# EAGLE board Codeshelf-0008.v01.brd.org (EAGLE 6.5.0)
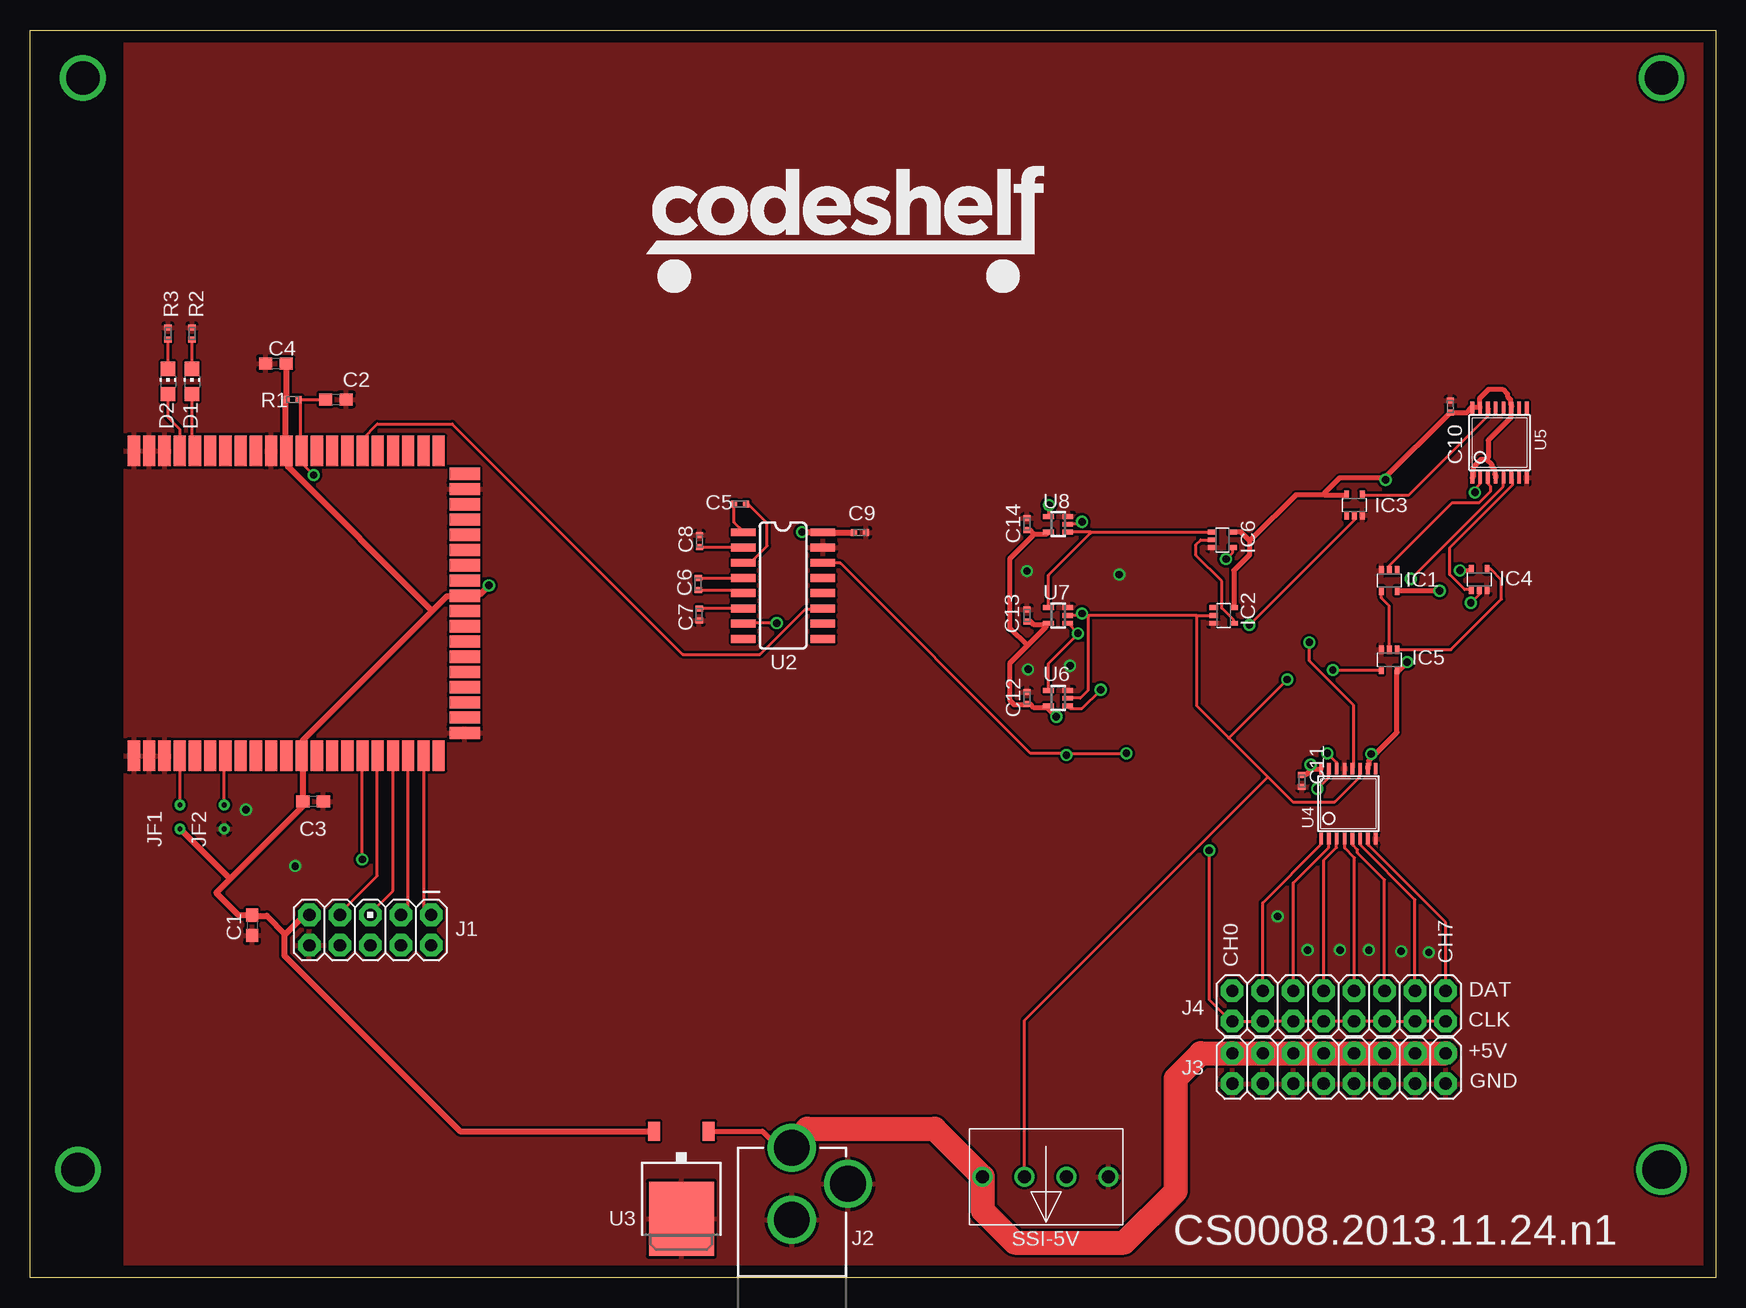
[diagram p0: board, top side]
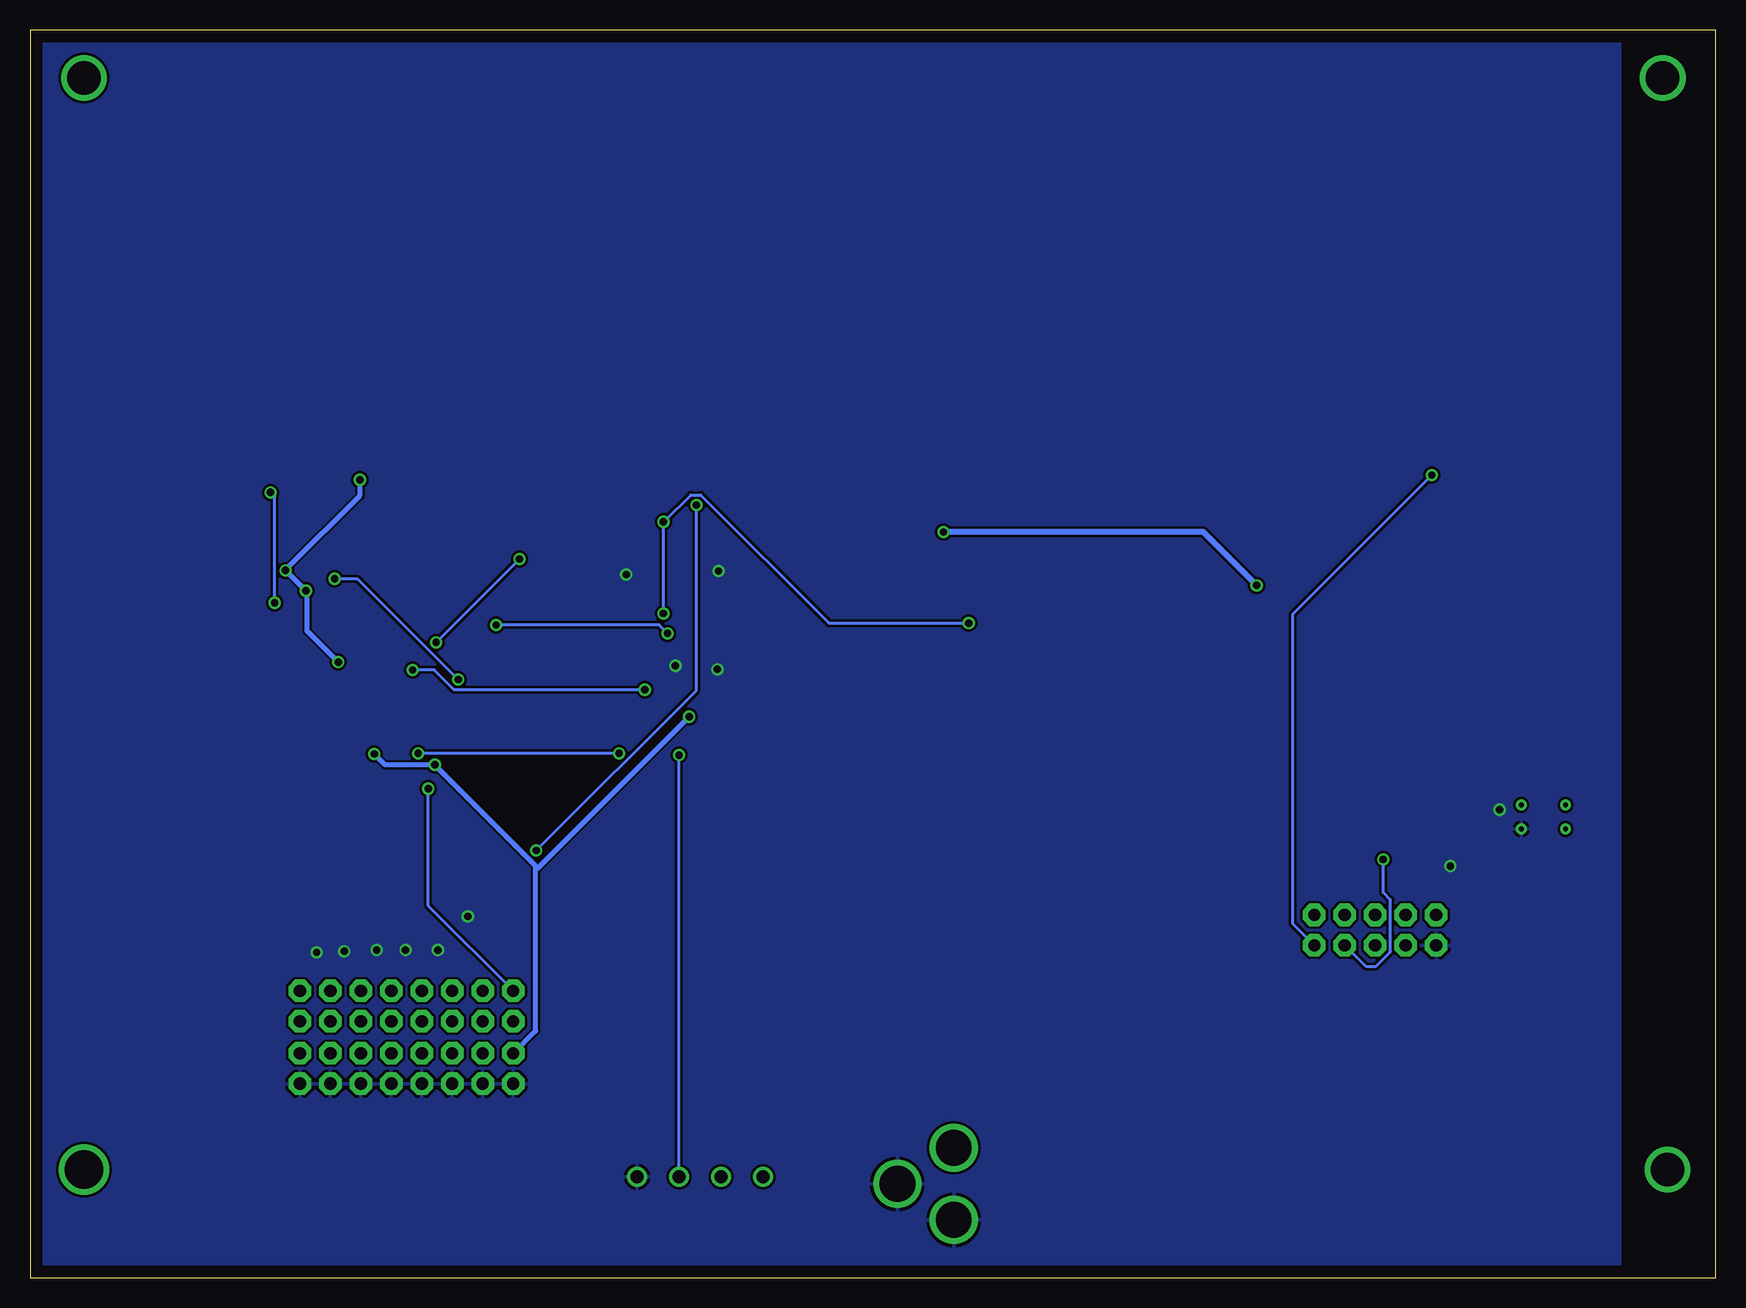
[diagram p1: board, bottom side, seen from below]

Size 140.5 x 104 mm. Coordinates in mm from the lower left corner, seen from the top.
Outline: 0,0 0,104 140.5,104 140.5,0 0,0
Copper layers (1*16): Top 0.035mm / dielectric 1.5mm / Bottom 0.035mm
Design rules "default *": minimum track width 10mil, minimum drill 24mil, track to track 8mil, track to pad 8mil, pad to pad 8mil, via to via 8mil, smd to smd 8mil, copper to edge 40mil, drill to drill 8mil, minimum pad ring 10mil, minimum via ring 8mil, stop-mask expansion 4mil, vias tented up to drill 0mil, thermal gap 10mil
Net classes: 1 3v3: width 0.5 mm; 2 5V: width 0.4 mm; 4 GND: width 0.5 mm; 5 RS485: width 0.4 mm

## Footprints (pad centres in the part's own frame; a part is rotated, then mirrored left to right if it is on the bottom)
C0603 = smd 1.1 x 1: 1 -0.85,0; 2 0.85,0
C0402 = smd 0.5 x 0.6: 1 -0.5,0; 2 0.5,0
CHIP-LED0805 = smd 1.2 x 1.2: A 0,-1.05; C 0,1.05
SC70-5 = smd 0.4 x 0.7: 1 -0.65,-0.85; 2 0,-0.85; 3 0.65,-0.85; 4 0.65,0.85; 5 -0.65,0.85
AVR_ICSP = drill 1.016 pad 1.88 octagon: 1 -1.27,5.08; 2 1.27,5.08; 3 -1.27,2.54; 4 1.27,2.54; 5 -1.27,0; 6 1.27,0; 7 -1.27,-2.54; 8 1.27,-2.54; 9 -1.27,-5.08; 10 1.27,-5.08
POWER_JACK_PTH = drill 2.997: GND 0,7.7; GNDBREAK 4.7,10.7; PWR 0,13.7
2X8 = drill 1.016 pad 1.88 octagon: 1 0,0; 2 0,2.54; 3 2.54,0; 4 2.54,2.54; 5 5.08,0; 6 5.08,2.54; 7 7.62,0; 8 7.62,2.54; 9 10.16,0; 10 10.16,2.54; 11 12.7,0; 12 12.7,2.54; 13 15.24,0; 14 15.24,2.54; 15 17.78,0; 16 17.78,2.54
JUMPER-VIA-2X = drill 0.4: 1 -1,0; 2 1,0
RF-R0402 = smd 0.5 x 0.6: 1 -0.5,0; 2 0.5,0
MOLEX-39357-0004 = drill 1.1: 1 -5.2,0; 2 -1.7,0; 3 1.8,0; 4 5.3,0
ZSFM201-1 = smd 2.54 x 1.016: 1 -12.7,28.829; 2 -12.7,27.559; 3 -12.7,26.289; 4 -12.7,25.019; 5 -12.7,23.749; 6 -12.7,22.479; 7 -12.7,21.209; 8 -12.7,19.939; 9 -12.7,18.669; 10 -12.7,17.399; 11 -12.7,16.129; 12 -12.7,14.859; 13 -12.7,13.589; 14 -12.7,12.319; 15 -12.7,11.049; 16 -12.7,9.779; 17 -12.7,8.509; 18 -12.7,7.239; 19 -12.7,5.969; 20 -12.7,4.699; 21 -12.7,3.429; 40 12.7,3.429; 41 12.7,4.699; 42 12.7,5.969; 43 12.7,7.239; 44 12.7,8.509; 45 12.7,9.779; 46 12.7,11.049; 47 12.7,12.319; 48 12.7,13.589; 49 12.7,14.859; 50 12.7,16.129; 51 12.7,17.399; 52 12.7,18.669; 53 12.7,19.939; 54 12.7,21.209; 55 12.7,22.479; 56 12.7,23.749; 57 12.7,25.019; 58 12.7,26.289; 59 12.7,27.559; 60 12.7,28.829 | smd 1.016 x 2.54: 22 -10.795,1.27; 23 -9.525,1.27; 24 -8.255,1.27; 25 -6.985,1.27; 26 -5.715,1.27; 27 -4.445,1.27; 28 -3.175,1.27; 29 -1.905,1.27; 30 -0.635,1.27; 31 0.635,1.27; 32 1.905,1.27; 33 3.175,1.27; 34 4.445,1.27; 35 5.715,1.27; 36 6.985,1.27; 37 8.255,1.27; 38 9.525,1.27; 39 10.795,1.27
SO016 = smd 0.66 x 2.032: 1 -4.445,-3.315; 2 -3.175,-3.315; 3 -1.905,-3.315; 4 -0.635,-3.315; 5 0.635,-3.315; 6 1.905,-3.315; 7 3.175,-3.315; 8 4.445,-3.315; 9 4.445,3.315; 10 3.175,3.315; 11 1.905,3.315; 12 0.635,3.315; 13 -0.635,3.315; 14 -1.905,3.315; 15 -3.175,3.315; 16 -4.445,3.315
TO252 = smd 1 x 1.6: 1 -2.28,-4.8; 2 2.28,-4.8 | smd 5.4 x 6.2: 3 0,2.5
TSSOP16 = smd 0.305 x 0.991: 1 -2.275,-2.918; 2 -1.625,-2.918; 3 -0.975,-2.918; 4 -0.325,-2.918; 5 0.325,-2.918; 6 0.975,-2.918; 7 1.625,-2.918; 8 2.275,-2.918; 9 2.275,2.918; 10 1.625,2.918; 11 0.975,2.918; 12 0.325,2.918; 13 -0.325,2.918; 14 -0.975,2.918; 15 -1.625,2.918; 16 -2.275,2.918
SOT353 = smd 0.4 x 0.9: 1 -0.65,-0.8; 2 0,-0.8; 3 0.65,-0.8; 4 0.65,0.8; 5 -0.65,0.8

## Placement (x,y rotation side)
C1  100pF  [C0603]  18.51,29.36 270 top
C2  1nF  [C0603]  25.5,73.2 0 top
C3  100pF  [C0603]  23.6,39.7 180 top
C4  100pF  [C0603]  20.5,76.2 0 top
C5  .1uF  [C0402]  59.2,64.47 0 top
C6  .1uF  [C0402]  55.7,57.8 270 top
C7  .1uF  [C0402]  55.79,55.27 270 top
C8  .1uF  [C0402]  55.8,61.4 90 top
C9  .1uF  [C0402]  69.2,62.1 0 top
C10  .1uF  [C0402]  118.4,72.6 90 top
C11  .1uF  [C0402]  106,41.4 90 top
C12  .1uF  [C0402]  83.1,48.3 270 top
C13  .1uF  [C0402]  83.1,55.2 270 top
C14  .1uF  [C0402]  83.1,62.8 270 top
D1  RED  [CHIP-LED0805]  13.5,74.7 0 top
D2  GREEN  [CHIP-LED0805]  11.5,74.7 0 top
IC1  74AHC1G04DCK  [SC70-5]  113.3,58.1 180 top
IC2  74AHC1G04DCK  [SC70-5]  99.5,55.2 270 top
IC3  74AHC1G04DCK  [SC70-5]  110.4,64.4 0 top
IC4  74AHC1G08DCK  [SC70-5]  120.8,58.2 0 top
IC5  74AHC1G08DCK  [SC70-5]  113.3,51.5 180 top
IC6  74AHC1G08DCK  [SC70-5]  99.4,61.5 270 top
J1  M05X2PTH  [AVR_ICSP]  28.37,28.96 270 top
J2  POWER_JACKPTH  [POWER_JACK_PTH]  63.5,-2.9 0 top
J3  M08X2  [2X8]  118,18.7 180 top
J4  M08X2  [2X8]  118,23.9 180 top
JF1  JUMPER-2X-SMT-VIA  [JUMPER-VIA-2X]  12.5,38.4 90 top
JF2  JUMPER-2X-SMT-VIA  [JUMPER-VIA-2X]  16.2,38.4 90 top
R1  100K  [RF-R0402]  21.9,73.2 180 top
R2  220  [RF-R0402]  13.5,78.7 270 top
R3  390  [RF-R0402]  11.5,78.7 270 top
SSI-5V  HEADER-4X39357  [MOLEX-39357-0004]  84.7,8.4 180 top
U1  ZSFM201-1A  [ZSFM201-1]  37.5,56.2 90 top
U2  MAX232SOIC16  [SO016]  62.78,57.68 270 top
U3  LM2936DT-3.3  [TO252]  54.3,7.4 180 top
U4  SN74HC595PW  [TSSOP16]  109.9,39.5 0 top
U5  74HCT193PW  [TSSOP16]  122.5,69.6 0 top
U6  D-FLIP-FLOP-74LV1G79  [SOT353]  85.7,48.3 90 top
U7  D-FLIP-FLOP-74LV1G79  [SOT353]  85.7,55.2 90 top
U8  D-FLIP-FLOP-74LV1G79  [SOT353]  85.7,62.8 90 top
U$1  [CODESHELF-LOGO]  51.4,82.1 0 top

## Library data of the parts
C1 C3 C4 = GW-devices; MFGN: Murata; MFGP: C0603C101K5RACTU
C2 = GW-devices; MFGN: Murata; MFGP: C0603C102K4RACTU
C5-C14 = GW-devices; MFGN: Murata; MFGP: GRM155R61C104KA88D; PRICE: 0.03
D1 = led; MFGN: OSRAM; MFGP: Q62702P5182; NOTES: DNP
D2 = led; MFGN: OSRAM; MFGP: Q65110P5179; NOTES: DNP
IC1-IC3 = 74xx-little-us; MFGN: NXP; MFGP: 74LVC1GU04GW; PRICE: 0.25
IC4-IC6 = 74xx-little-us; MFGN: Diodes, Inc; MFGP: 74LVC1G08SE; PRICE: 0.38
J1 J3 J4 = SparkFun
J2 = GW-devices; MFG: Kobiconn; MFGP: 163-7620-E
JF1 JF2 U$1 = GW-devices
R1 = GW-devices; MFGN: Panasonic; MFGP: ERJ-2GEJ104X
R2 = GW-devices; MFGN: Panasonic; MFGP: ERJ-2GEJ224X; NOTES: DNP
R3 = GW-devices; MFGN: Panasonic; MFGP: ERJ-2GEJ394X; NOTES: DNP
SSI-5V = GW-devices; MFGN: Molex; MFGP: 39357-0004; PRICE: 1.00
U1 = GW-devices; MFGN: CEL; MFGP: ZFSM-201-1C; PRICE: 29.00
U2 = SparkFun; MFGN: TI; MFGP: MAX232DR; PRICE: 0.86
U3 = national-semiconductor; MFGN: STM Electronics; MFGP: L4931ABDT33-TR; MPN: LM2936DT-3.3.; OC_FARNELL: 1286863; OC_NEWARK: 26M0361; PRICE: 1.00
U4 = GW-devices; MFGN: TI; MFGP: SN74HC595PWR; PRICE: 0.31
U5 = GW-devices; MFGN: NXP; MFGP: 74HCT193PW; PRICE: 0.60
U6-U8 = GW-devices; MFGN: TI; MFGP: SN74LVC1G79DBVR; PRICE: 0.27

## Nets
+3V3 [3v3]: C1.1 C3.2 C4.2 C9.1 J1.9 JF1.1 R1.2 U1.12 U1.31 U1.50 U2.16 U3.2
+5V [5V]: C10.1 C11.2 C12.2 C13.2 C14.2 IC1.5 IC2.5 IC3.5 IC4.5 IC5.5 IC6.5 J2.PWR J3.1 J3.3 J3.5 J3.7 J3.9 J3.11 J3.13 J3.15 SSI-5V.4 U3.1 U4.10 U4.16 U5.1 U5.4 U5.11 U5.15 U5.16 U6.5 U7.5 U8.5
C1: C5.1 U2.1
C2: C6.1 U2.4
GND [GND]: C1.2 C2.2 C3.1 C4.1 C7.2 C8.2 C9.2 C10.2 C11.1 C12.1 C13.1 C14.1 IC1.3 IC2.3 IC3.3 IC4.3 IC5.3 IC6.3 J1.10 J2.GND J2.GNDBREAK J3.2 J3.4 J3.6 J3.8 J3.10 J3.12 J3.14 J3.16 JF2.1 R2.1 R3.1 SSI-5V.1 U1.1 U1.2 U1.3 U1.22 U1.38 U1.51 U1.58 U1.59 U1.60 U2.15 U3.3 U4.8 U4.13 U5.8 U6.3 U7.3 U8.3
N$1: D2.A U1.57
N$2: D1.A U1.56
N$3: D2.C R3.2
N$4: D1.C R2.2
N$6: JF2.2 U1.7
N$7: JF1.2 U1.4
N$8: C5.2 U2.3
N$10: J4.13 U4.1
N$11: C6.2 U2.5
N$12: C7.1 U2.6
N$13: J4.11 U4.2
N$14: J4.9 U4.3
N$15: C8.1 U2.2
N$16: J4.7 U4.4
N$17: J4.5 U4.5
N$18: J4.3 U4.6
N$19: J4.1 U4.7
N$20: J4.15 U4.15
N$22: IC1.4 IC5.2
N$23: IC4.4 IC5.1
N$24: IC5.4 U6.1
N$25: IC3.2 U6.4 U7.1
N$26: IC6.1 U7.4 U8.1
N$28: IC2.4 IC6.2
N$29: IC1.2 U5.3
N$30: IC4.2 U5.2
N$31: IC4.1 U5.6
N$32: IC3.4 U5.14
N$33: IC6.4 U4.12
RESET: C2.1 J1.2 R1.1 U1.49
RTCK: J1.4 U1.16
SSI-CLK: J4.2 J4.4 J4.6 J4.8 J4.10 J4.12 J4.14 J4.16 U8.4
SSI-CLK-3V3: U1.42
SSI-CLK-5V: IC2.2 SSI-5V.3 U2.7 U4.11 U5.5 U6.2 U7.2 U8.2
SSI-TX-3V3: U1.45 U2.11
SSI-TX-5V: SSI-5V.2 U2.14 U4.14
TCK: J1.3 U1.19
TDI: J1.5 U1.18
TDO: J1.7 U1.17
TMS: J1.1 U1.20

## Tracks (layer width: path | path; a pad name or v marks a point on that pad's centre or on a via)
+3V3  (via drill 0.61)
  Top 0.5: 21.27,28.62 22.85,30.2 23.25,30.2 J1.9 | 21.27,28.62 21.2,28.55 21.2,26.85 35.85,12.2 U3.2 | 21.27,28.62 19.75,30.15 18.75,30.15 C1.1 18.5,30.25 17.35,30.25 15.53,32.08 16.68,33.23 | C4.2 21.4,76.15 R1.2 21.3,73 21.3,68.95 21.35,68.9 U1.50 21.5,68.7 21.5,67.6 33.52,55.58 | 33.52,55.58 22.75,44.8 22.75,43.7 U1.12 22.75,43.4 C3.2 22.85,39.5 22.85,39.4 16.68,33.23 | 33.52,55.58 34.75,56.8 36.2,56.8 U1.31 36.45,56.95 37.5,56.95 v38.25,57.7 | v64.35,62.15 65.85,62.15 U2.16 66.3,62.1 C9.1 | 16.68,33.23 JF1.1
  Bottom 0.5: v64.35,62.15 42.7,62.15 v38.25,57.7
+5V  (via drill 0.61)
  Top 0.4: 121.45,68.2 120.95,68.2 120.3,67.55 120.3,66.75 120.25,66.7 U5.1 | 121.45,68.2 121.85,67.8 121.85,67.6 122.1,67.35 122.1,66.95 122.2,66.85 122.2,66.7 U5.4 | 121.45,68.2 121.55,68.35 121.55,69.8 123.45,71.7 123.45,72.5 U5.11 123.5,72.7 123.4,72.8 123.4,73.2 123.15,73.45 123.15,73.65 122.75,74.05 121.6,74.05 120.85,73.3 120.85,72.75 U5.15 120.85,72.55 120.4,72.55 U5.16 120.2,72.55 119.75,72.1 C10.1 118.25,72 112.9,66.65 | IC2.5 100.35,58.95 101.65,60.25 101.65,61.45 | 101.65,61.45 100.95,62.15 IC6.5 | 107.9,65.25 105.5,65.25 101.8,61.55 101.65,61.45 | 107.9,65.25 IC3.5 | 112.9,66.65 109.15,66.65 107.9,65.4 107.9,65.25 | C14.2 83.4,62.3 83.7,62 | 83.7,62 84.75,62 U8.5 | 84.75,47.5 83.7,47.5 83.4,47.8 C12.2 82.95,47.75 82.05,47.75 81.7,48.1 81.7,51.25 83.12,52.67 | 84.75,47.5 U6.5 | C13.2 83.4,54.7 83.7,54.4 84.7,54.4 | 84.7,54.4 84.75,54.4 U7.5 | 83.12,52.67 84.7,54.25 84.7,54.4 | 83.7,62 83.6,61.85 81.7,59.95 81.7,54.1 83.12,52.67 | U3.1 61.05,12.2 62.5,10.75 J2.PWR | v117.5,57.25 IC1.5 | v119.2,58.95 120.05,58.95 IC4.5 | C11.2 106.35,41.9 106.85,42.4 | 106.85,42.4 107.6,42.4 U4.16 | 111.97,43.48 111.6,43.1 111.6,42.7 111.5,42.6 111.5,42.45 U4.10 | 111.97,43.48 113.95,45.45 IC5.5 114.1,50.6 v114.8,51.3 | v106.75,42.75 106.75,42.55 106.85,42.4 | v111.8,43.65 111.97,43.48 | v85.55,46.75 84.9,47.4 84.75,47.5 | v113,66.5 112.9,66.65
  Top 2: J2.PWR 64.8,12.4 75.4,12.4 SSI-5V.4 79.4,5.6 82.1,2.9 91.2,2.9 95.5,7.2 95.5,16.6 97.6,18.7 J3.15 J3.13 J3.11 J3.9 J3.7 J3.5 J3.3 J3.1
  Bottom 0.4: v111.8,43.65 110.9,42.75 v106.75,42.75 106.65,42.6 98.35,34.3 98.35,34.1 | v114.8,51.3 117.4,53.9 117.4,57.1 v117.5,57.25 v119.2,58.95 119.1,59.1 113,65.2 v113,66.5 | 98.35,34.1 98.35,20.55 100.2,18.7 J3.15 | v85.55,46.75 98.2,34.1 98.35,34.1
C1
  Top 0.254: C5.1 58.7,62.95 59.5,62.15 U2.1
C2
  Top 0.254: C6.1 59.45,58.3 U2.4
GND  (via drill 0.61)
  other vias: 22.1,34.3 18,39 83.1,58.9 83.2,50.7 90.8,58.6 86.7,51 104,30.1 106.5,27.3 109.2,27.3 111.6,27.3 114.3,27.2 116.6,27.1
  pour Bottom: 8,0 8,104 140.5,104 140.5,0
  pour Top: 8,0 8,104 140.5,104 140.5,0
N$1
  Top 0.254: D2.A 11.5,71.7 12.5,70.7 12.5,68.9 U1.57
N$2
  Top 0.254: D1.A 13.5,69.15 U1.56
N$3
  Top 0.254: D2.C R3.2
N$4
  Top 0.254: D1.C R2.2
N$5  (via drill 2.8)
  other vias: 4,9
N$6
  Top 0.254: U1.7 16.2,43.45 JF2.2
N$7
  Top 0.254: 12.5,43.5 U1.4 12.5,43.4 JF1.2
N$8
  Top 0.254: C5.2 59.7,64.45 59.9,64.45 61.45,62.9 61.45,61 60.05,59.6 59.5,59.6 U2.3
N$9  (via drill 3.2)
  other vias: 136,9
N$10
  Top 0.254: U4.1 107.6,36.55 107.6,36.1 102.75,31.25 J4.13
N$11
  Top 0.254: C6.2 59.2,57.3 59.45,57.05 U2.5
N$12
  Top 0.254: C7.1 55.8,55.8 59.45,55.8 U2.6
N$13
  Top 0.254: J4.11 105.3,32.9 108.25,35.85 108.25,36.55 U4.2
N$14
  Top 0.254: U4.3 108.9,36.55 108.9,35.85 107.85,34.8 J4.9
N$15
  Top 0.254: C8.1 59.45,60.9 U2.2
N$16
  Top 0.254: U4.4 109.6,36.55 109.6,35.8 110.4,35 110.4,23.9 J4.7
N$17
  Top 0.254: U4.5 110.25,36.55 110.25,36.05 110.65,35.65 110.65,35.4 112.9,33.15 112.9,23.9 J4.5
N$18
  Top 0.254: U4.6 110.9,36.55 110.9,36.05 115.45,31.5 J4.3
N$19
  Top 0.254: J4.1 118,29.6 111.55,36.05 111.55,36.55 U4.7
N$20  (via drill 0.61)
  Top 0.254: v107.3,40.75 108.25,41.7 108.25,42.4 U4.15
  Bottom 0.254: v107.3,40.75 107.3,31 100.2,23.9 J4.15
N$21  (via drill 2.8)
  other vias: 4.4,100
N$22
  Top 0.254: IC5.2 113.3,56 112.65,56.65 IC1.4
N$23
  Top 0.254: IC5.1 118.45,52.35 122.65,56.55 122.65,58.15 121.75,59.05 IC4.4
N$24  (via drill 0.61)
  Top 0.254: v108.6,50.65 IC5.4 | v89.25,49 87.7,47.45 86.7,47.45 U6.1
  Bottom 0.254: v108.6,50.65 106.8,50.65 105.15,49 v89.25,49
N$25  (via drill 0.61)
  Top 0.254: IC3.2 110.4,63.15 v101.65,54.4 | U7.1 v87.35,53.7 87.3,53.6 84.9,51.2 U6.4
  Bottom 0.254: v101.65,54.4 88.05,54.4 v87.35,53.7
N$26
  Top 0.254: 88.4,62.15 U8.1 | 88.4,62.15 IC6.1 | U7.4 84.9,58.55 88.4,62.05 88.4,62.15
N$27  (via drill 2.8)
  other vias: 136,100
N$28
  Top 0.254: IC2.4 100.35,54.8 99.35,55.8 99.35,58.05 97.2,60.2 97.2,61.1 97.6,61.5 IC6.2
N$29
  Top 0.254: IC1.2 113.3,59.35 118.55,64.6 120.8,64.6 121.75,65.55 121.75,65.95 121.5,66.2 121.5,66.65 U5.3
N$30  (via drill 0.61)
  Top 0.254: IC4.2 120.8,56.95 v120.1,56.25 | v120.45,65.45 120.45,65.75 120.9,66.2 120.9,66.65 U5.2
  Bottom 0.254: v120.1,56.25 120.1,65.1 v120.45,65.45
N$31
  Top 0.254: IC4.1 119.6,57.35 118.35,58.6 118.35,60.85 123.6,66.1 123.6,66.55 123.5,66.65 U5.6
N$32
  Top 0.254: IC3.4 114.95,65.25 121.65,71.95 121.65,72.4 121.55,72.5 U5.14
N$33  (via drill 0.61)
  Top 0.254: IC6.4 100.25,60.45 v99.7,59.9 | v106.65,52.95 106.65,51.4 110.35,47.7 110.35,42.55 110.25,42.45 U4.12
  Bottom 0.254: v106.65,52.95 v99.7,59.9
RESET  (via drill 0.61)
  Top 0.254: C2.1 R1.1 22.55,73.1 22.55,68.95 22.6,68.9 U1.49 22.7,68.8 22.7,67.85 v23.65,66.9
  Bottom 0.254: v23.65,66.9 35.25,55.3 35.25,29.5 J1.2
RTCK  (via drill 0.61)
  Top 0.254: v27.7,34.85 27.7,43.5 U1.16
  Bottom 0.254: v27.7,34.85 27.7,32.1 27.1,31.5 27.1,27.15 28.35,25.9 29.1,25.9 J1.4
SSI-CLK  (via drill 0.61)
  Top 0.254: U8.4 84.9,64.35 v84.95,64.4 | v98.3,35.6 98.3,23.15 100.05,21.4 100.2,21.4 J4.16 100.35,21.35 J4.14 102.85,21.4 105.3,21.4 J4.12 105.4,21.4 107.8,21.4 J4.10 107.95,21.4 110.35,21.4 J4.8 110.5,21.4 112.9,21.4 J4.6 113.05,21.35 J4.4 115.55,21.4 118,21.4 J4.2
  Bottom 0.254: v84.95,64.4 84.95,48.95 v98.3,35.6
SSI-CLK-5V  (via drill 0.61)
  Top 0.254: 87.7,55.2 U7.2 | 88.2,55.2 87.7,55.2 | 97.25,55.2 88.2,55.2 | 97.25,55.2 IC2.2 | U6.2 87.55,48.3 88.2,48.95 88.2,55.2 | U8.2 87.5,62.8 v87.7,63 | 87.7,55.2 v87.7,55.35 | 99.92,44.98 97.25,47.65 97.25,55.2 | 103.17,41.73 99.92,44.98 | 103.17,41.73 105.25,39.65 108.75,39.65 110.85,41.75 110.85,42.4 U4.11 | v115.1,58.25 122.8,65.95 122.8,66.65 U5.5 | 99.92,44.98 v104.8,49.85 | v62.25,54.55 59.5,54.55 U2.7 | SSI-5V.3 82.9,21.45 103.17,41.73
  Bottom 0.254: v87.7,55.35 v87.7,63 87.6,63.05 85.4,65.25 84.6,65.25 73.9,54.55 v62.25,54.55 | v115.1,58.25 113.2,58.25 v104.8,49.85
SSI-TX-3V3
  Top 0.254: U2.11 66.05,55.75 64.65,55.75 60.85,51.95 54.4,51.95 35.2,71.15 28.95,71.15 27.75,69.95 27.75,68.9 U1.45
SSI-TX-5V  (via drill 0.61)
  Top 0.254: v108.15,43.7 108.9,42.95 108.9,42.45 U4.14 | 86.4,43.7 83.4,43.7 67.55,59.55 66.1,59.55 U2.14 | 86.4,43.7 v91.4,43.7 | v86.4,43.55 86.4,43.7
  Bottom 0.254: v91.4,43.7 v108.15,43.7 | SSI-5V.2 v86.4,43.55
TCK
  Top 0.254: U1.19 31.5,43.5 31.5,30.85 30.9,30.25 J1.3
TDI
  Top 0.254: U1.18 30.25,32.25 28.4,30.4 28.4,30.25 J1.5
TDO
  Top 0.254: U1.17 28.95,43.5 28.95,33.5 25.85,30.4 25.85,30.25 J1.7
TMS
  Top 0.254: U1.20 32.85,43.5 32.85,30.85 33.45,30.25 J1.1

## Text on the board
tPlace: CH0 | CH7 | DAT | CLK | +5V | GND | CS0008.2013.11.24.n1